# EAGLE board afb_r001 (EAGLE 9.6.2)
REV: B
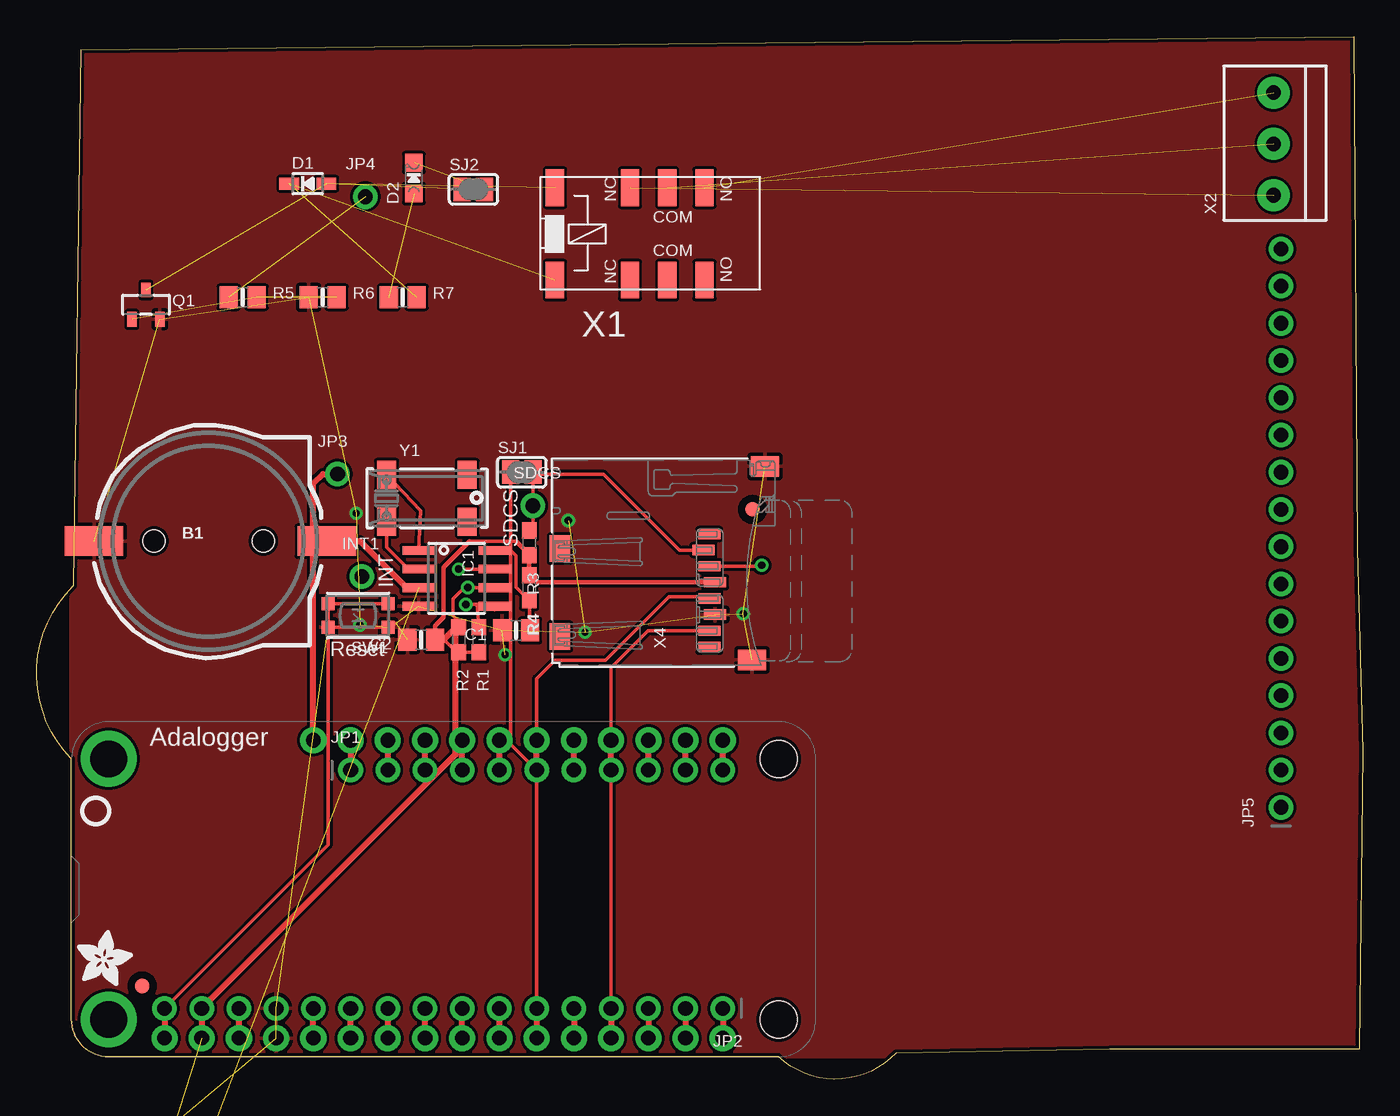
[diagram p0: board, top side]
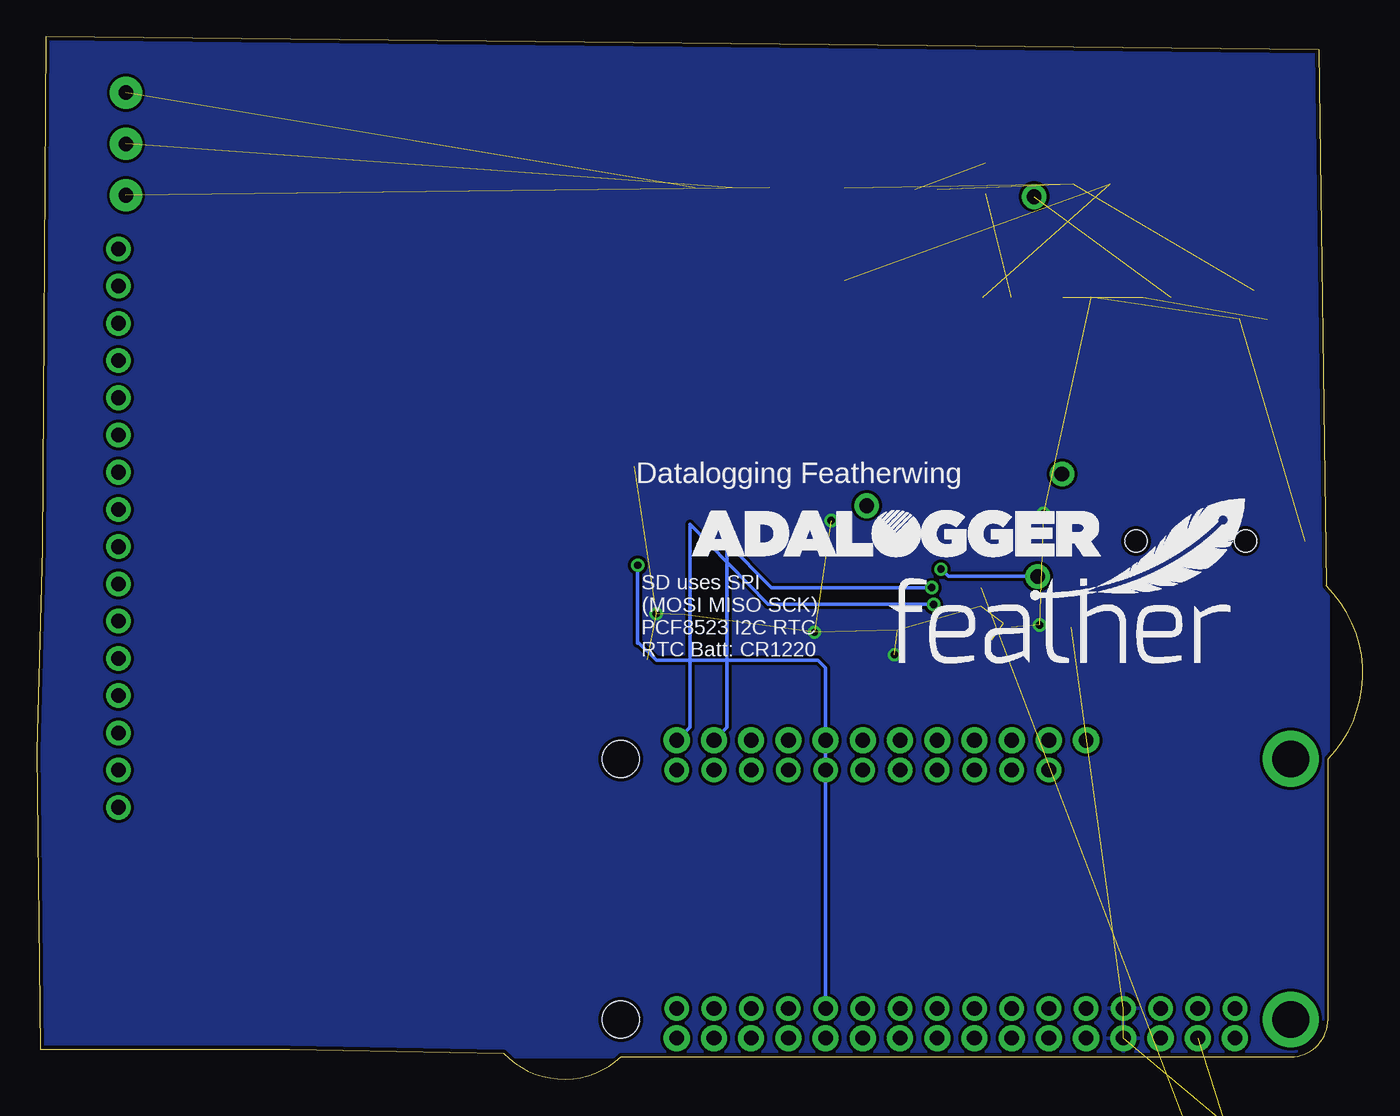
[diagram p1: board, bottom side, seen from below]

Size 90.52 x 71.13 mm. Coordinates in mm from the lower left corner, seen from the top.
Outline: 3.01,70.24 89.88,71.13 90.13,36.2 90.52,22.36 90.26,2.04 73.24,2.04 58.64,1.79 arc-90 50.64,1.53 4.92,1.53 arc-90 2.38,4.07 2.38,21.85 arc-90 2.5,33.66 3.01,70.24
Copper layers (1*16): Top 0.035mm / dielectric 1.5mm / Bottom 0.035mm
Design rules "adafruit *": minimum track width 8mil, minimum drill 15.5mil, track to track 8mil, track to pad 8mil, pad to pad 8mil, via to via 8mil, smd to smd 8mil, copper to edge 10mil, drill to drill 8mil, minimum pad ring 10mil, minimum via ring 8mil, stop-mask expansion 2mil, vias tented up to drill 20mil, thermal gap 10mil
Net classes: 1 HV: width 0.406 mm, drill 0.381 mm, clearance 1.016 mm

## Footprints (pad centres in the part's own frame; a part is rotated, then mirrored left to right if it is on the bottom)
CR1220-2 = smd 4 x 2: + 8.29,0; - -7.6,0 | hole 1.5: 3.95,0; -3.5,0
0805-NO = smd 1.24 x 1.5: 1 -0.95,0; 2 0.95,0
C0603 = smd 1.1 x 1: 1 -0.85,0; 2 0.85,0
SOD-323 = smd 1.35 x 0.8: A 1.27,0; C -1.27,0
CHIPLED_0805_NOOUTLINE = smd 1.2 x 1.2: A 0,-1.05; C 0,1.05
SMADIODE = smd 2.54 x 2.54: A 2.349,0; C -2.349,0
FIDUCIAL_1MM = smd 1 x 1: 1 0,0
SOIC8_150MIL = smd 0.6 x 2.2: 1 -1.905,-2.6; 2 -0.635,-2.6; 3 0.635,-2.6; 4 1.905,-2.6; 5 1.905,2.6; 6 0.635,2.6; 7 -0.635,2.6; 8 -1.905,2.6
SO16W = smd 0.6 x 2.2: 1 -4.445,-4.6; 2 -3.175,-4.6; 3 -1.905,-4.6; 4 -0.635,-4.6; 5 0.635,-4.6; 6 1.905,-4.6; 7 3.175,-4.6; 8 4.445,-4.6; 9 4.445,4.6; 10 3.175,4.6; 11 1.905,4.6; 12 0.635,4.6; 13 -0.635,4.6; 14 -1.905,4.6; 15 -3.175,4.6; 16 -4.445,4.6
1X01_ROUND = drill 1 pad 1.676: 1 0,0
1X11_ROUND = drill 1 pad 1.676: 1 -12.7,0; 2 -10.16,0; 3 -7.62,0; 4 -5.08,0; 5 -2.54,0; 6 0,0; 7 2.54,0; 8 5.08,0; 9 7.62,0; 10 10.16,0; 11 12.7,0
1X16_ROUND = drill 1 pad 1.676: 1 -19.05,0; 2 -16.51,0; 3 -13.97,0; 4 -11.43,0; 5 -8.89,0; 6 -6.35,0; 7 -3.81,0; 8 -1.27,0; 9 1.27,0; 10 3.81,0; 11 6.35,0; 12 8.89,0; 13 11.43,0; 14 13.97,0; 15 16.51,0; 16 19.05,0
2X20 = drill 1.016 octagon: 1 -24.13,-1.27; 2 -24.13,1.27; 3 -21.59,-1.27; 4 -21.59,1.27; 5 -19.05,-1.27; 6 -19.05,1.27; 7 -16.51,-1.27; 8 -16.51,1.27; 9 -13.97,-1.27; 10 -13.97,1.27; 11 -11.43,-1.27; 12 -11.43,1.27; 13 -8.89,-1.27; 14 -8.89,1.27; 15 -6.35,-1.27; 16 -6.35,1.27; 17 -3.81,-1.27; 18 -3.81,1.27; 19 -1.27,-1.27; 20 -1.27,1.27; 21 1.27,-1.27; 22 1.27,1.27; 23 3.81,-1.27; 24 3.81,1.27; 25 6.35,-1.27; 26 6.35,1.27; 27 8.89,-1.27; 28 8.89,1.27; 29 11.43,-1.27; 30 11.43,1.27; 31 13.97,-1.27; 32 13.97,1.27; 33 16.51,-1.27; 34 16.51,1.27; 35 19.05,-1.27; 36 19.05,1.27; 37 21.59,-1.27; 38 21.59,1.27; 39 24.13,-1.27; 40 24.13,1.27
L3225M = smd 1.6 x 2.2: 1 -1.4,0; 2 1.4,0
FEATHERWING_NODIM = drill 1 pad 1.778: 1 6.35,1.27; 2 8.89,1.27; 3 11.43,1.27; 4 13.97,1.27; 5 16.51,1.27; 6 19.05,1.27; 7 21.59,1.27; 8 24.13,1.27; 9 26.67,1.27; 10 29.21,1.27; 11 31.75,1.27; 12 34.29,1.27; 13 36.83,1.27; 14 39.37,1.27; 15 41.91,1.27; 16 44.45,1.27; 17 44.45,21.59; 18 41.91,21.59; 19 39.37,21.59; 20 36.83,21.59; 21 34.29,21.59; 22 31.75,21.59; 23 29.21,21.59; 24 26.67,21.59; 25 24.13,21.59; 26 21.59,21.59; 27 19.05,21.59; 28 16.51,21.59 | drill 2.5 pad 3.81: P$1 2.54,20.32; P$2 2.54,2.54 | hole 2.54: 48.26,20.32; 48.26,2.54
SOT23-R = smd 0.635 x 1.016: 1 -0.95,-1; 2 0.95,-1; 3 0,1
0603-NO = smd 1.1 x 1: 1 -0.85,0; 2 0.85,0
0805-THM = drill 0.813 pad 1.676 octagon: 1 -5.08,0; 2 5.08,0
R0603 = smd 1 x 1.1: 1 -0.85,0; 2 0.85,0
SOLDERJUMPER_CLOSEDWIRE = smd 1.168 x 1.6: 1 -0.762,0; 2 0.762,0 | smd 0.635 x 0.203: WIRE 0,0
BTN_KMR2_4.6X2.8 = smd 0.9 x 0.9: A 2.05,0.8; A' -2.05,0.8; B 2.05,-0.8; B' -2.05,-0.8
SOIC8E_MPS = smd 1.46 x 0.559: 1 -2.724,1.905; 2 -2.724,0.635; 3 -2.724,-0.635; 4 -2.724,-1.905; 5 2.724,-1.905; 6 2.724,-0.635; 7 2.724,0.635; 8 2.724,1.905 | smd 2.565 x 3.454: EPAD 0,0
RELAY_EE2_NOLATCH = smd 1.25 x 2.5: 1 -6.5,-3.15; 3 -1.37,-3.15; 4 1.17,-3.15; 5 3.71,-3.15; 8 3.71,3.15; 9 1.17,3.15; 10 -1.37,3.15; 12 -6.5,3.15
TERMBLOCK_1X3-3.5MM = drill 1 pad 2.184: 1 3.55,0; 2 0.05,0; 3 -3.45,0
MICROSD = smd 0.7 x 1.5: 1 9,-10.64; 2 7.9,-10.24; 3 6.8,-10.64; 4 5.7,-11.04; 5 4.6,-10.64; 6 3.5,-11.04; 7 2.4,-10.64; 8 1.3,-10.64 | smd 1.8 x 1.4: CD1 2,-0.44; CD2 8,-0.44 | smd 1.4 x 1.9: MT1 0.4,-13.54; MT2 13.6,-14.44
CRYSTAL_8X3.8 = smd 1.3 x 1.9: P$1 -2.75,-1.6; P$2 2.75,-1.6; P$3 2.75,1.6; P$4 -2.75,1.6

## Placement (x,y rotation side)
B1  cr1220  [CR1220-2]  11.52,36.71 0 top
C1  10uF  [0805-NO]  32.73,30.62 180 top
C2  10uF  [0805-NO]  26.25,29.98 180 top
C3  [C0603]  -4.23,-21.84 0 top  (outside the outline)
C4  [C0603]  -4.23,-42.66 0 top  (outside the outline)
C5  [C0603]  -4.23,-55.49 0 top  (outside the outline)
C6  [C0603]  -4.23,-71.75 0 top  (outside the outline)
C7  [C0603]  -4.23,-75.43 0 top  (outside the outline)
D1  1N4148  [SOD-323]  18.51,61.1 0 top
D2  RED  [CHIPLED_0805_NOOUTLINE]  25.75,61.48 0 top
D3  [SMADIODE]  -1.94,-38.35 0 top  (outside the outline)
FID1  FIDUCIAL_1MM  [FIDUCIAL_1MM]  48.86,38.87 0 top
FID2  FIDUCIAL_1MM  [FIDUCIAL_1MM]  7.2,6.36 0 top
IC1  PCF8523T  [SOIC8_150MIL]  28.67,34.17 270 top
IC2  DS3231/SO  [SO16W]  -11.34,-74.16 0 top  (outside the outline)
INT1  [1X01_ROUND]  22.19,34.3 0 top
JP1  [1X11_ROUND]  34.13,21.09 0 top
JP2  [1X16_ROUND]  27.78,4.83 180 top
JP3  [1X01_ROUND]  20.54,41.28 0 top
JP4  [1X01_ROUND]  22.44,60.21 0 top
JP5  [1X16_ROUND]  84.93,37.6 90 top
JP6  [2X20]  20.16,-27.93 0 top  (outside the outline)
L2  [L3225M]  -3.34,-47.49 0 top  (outside the outline)
MS1  FEATHERWING_NODIM  [FEATHERWING_NODIM]  2.38,1.53 0 top
Q1  MMBT2222  [SOT23-R]  7.46,52.84 0 top
R1  10K  [0603-NO]  30.19,29.98 270 top
R2  10K  [0603-NO]  28.79,29.98 270 top
R3  100K  [0603-NO]  33.62,36.58 270 top
R4  1K  [0603-NO]  33.62,33.54 270 top
R5  1K  [0805-NO]  14.06,53.35 0 top
R6  10K  [0805-NO]  19.52,53.35 0 top
R7  1K  [0805-NO]  24.98,53.35 0 top
R8  [0805-THM]  0.22,-14.22 0 top  (outside the outline)
R9  [R0603]  -4.23,-18.15 0 top  (outside the outline)
R10  [R0603]  -4.23,-51.81 0 top  (outside the outline)
R11  [R0603]  -4.23,-59.3 0 top  (outside the outline)
R12  [R0603]  -4.23,-79.24 0 top  (outside the outline)
SDCS  [1X01_ROUND]  33.87,39.12 0 top
SJ1  [SOLDERJUMPER_CLOSEDWIRE]  33.11,41.41 0 top
SJ2  [SOLDERJUMPER_CLOSEDWIRE]  29.81,60.71 0 top
SW1  KMR2  [BTN_KMR2_4.6X2.8]  21.94,31.63 180 top
U1  MP1584  [SOIC8E_MPS]  -1.69,-8.12 0 top  (outside the outline)
U$2  [FEATHERLOGO]  32.35,28.33 0 bottom
U$3  [ADALOGGER_LOGO]  45.81,35.57 0 bottom
U$4  [ADAFRUIT_3.5MM]  2.76,6.36 0 top
U$5  [PCBFEAT-REV-040]  4.03,18.3 0 top
X1  RELAY_NONLATCHING-EE2NUH  [RELAY_EE2_NOLATCH]  41.87,57.67 0 top
X2  [TERMBLOCK_1X3-3.5MM]  84.42,63.76 90 top
X3  [TERMBLOCK_1X3-3.5MM]  -0.54,-65.4 0 top  (outside the outline)
X4  microsd  [MICROSD]  35.27,28.2 90 top
Y1  32khz  [CRYSTAL_8X3.8]  26.63,39.63 0 top

## Library data of the parts
B1 C1 C2 D1 D2 IC1 INT1 JP1-JP5 MS1 Q1 R1-R7 SDCS SJ1 SJ2 SW1 U$2-U$5 X1-X4 Y1 = microbuilder
C3-C7 D3 JP6 R8-R12 = adafruit
FID1 FID2 = microbuilder; BOM: EXCLUDE
IC2 = DS3231; AVAILABILITY: Unavailable; DESCRIPTION: Real Time Clock (RTC) IC Clock/Calendar I²C, 2-Wire Serial 16-SOIC (0.295, 7.50mm Width); MF: Maxim Integrated; MP: DS3231; PACKAGE: SOIC-16 Maxim Integrated; PRICE: None
L2 = rcl; SPICEPREFIX: L
U1 = MP1584; BUILT_BY: EMA_Cory; COPYRIGHT: Copyright (C) 2018 Accelerated Designs. All rights reserved; DATASHEET: https://www.monolithicpower.com/en/documentview/productdocument/index/version/2/document_type/Datasheet/lang/en/sku/MP1584/document_id/204; MANUFACTURER_PART_NUMBER: MP1584; SOURCELIBRARY: MPS_2020-01-27; VENDOR: Monolithic Power Systems Inc

## Nets
3.3V: D1.C R7.2 X1.1
4V: C4.1 C7.1 D3.C L2.1 L2.2 R8.2 U1.1
+3V3: C2.1 IC2.2 JP2.15 MS1.2 R1.2 R2.2 R3.2 R4.1 X4.4
A: JP2.12 MS1.5
AREF: JP2.14 MS1.3
B: JP2.11 MS1.6
BSC: C7.2
C: JP2.10 MS1.7
CMC: C3.1 C5.1 U1.3
COM1 [HV]: X1.9 X2.2
CR1220: B1.+ IC1.3 IC2.14
CS: JP1.6 MS1.22 SJ1.1
D: JP2.9 MS1.8
E: JP2.8 MS1.9
EN: JP1.1 MS1.27
ENC: R12.2 U1.2
F: JP2.7 MS1.10
G: JP2.1 MS1.16
GND: B1.- C1.2 C2.2 C4.2 C5.2 D3.A IC1.4 IC2.13 JP2.13 MS1.4 Q1.2 R6.1 R9.1 R10.1 R11.1 SW1.A SW1.A' U1.5 U1.EPAD X3.1 X4.6 X4.MT1 X4.MT2
H: JP1.9 MS1.19
I: JP1.8 MS1.20
INT1: IC1.7 INT1.1
J: JP1.7 MS1.21
L: JP1.5 MS1.23
M: JP1.4 MS1.24
MISO: JP2.4 MS1.13 X4.7
MOSI: JP2.5 MS1.12 X4.3
N: JP1.3 MS1.25
N$1: C1.1 IC1.8 R4.2
N$2: D1.A Q1.3 SJ2.1 X1.12
N$3: R8.1 R9.2 U1.4
N$4: C3.2 R10.2
N$5: IC2.16
N$6: C6.1 R12.1 U1.7 X3.2 X3.3
N$7: IC1.1 Y1.P$4
N$8: IC1.2 Y1.P$1
N$9: IC2.15
N$10: R11.2 U1.6
N$11: U1.8
N$22: Q1.1 R5.2 R6.2
N$24: JP4.1 R5.1
N$25: D2.C SJ2.2
N$26: D2.A R7.1
N$28 [HV]: X1.10 X2.3
NO1 [HV]: X1.8 X2.1
RESET: JP2.16 MS1.1 SW1.B SW1.B'
RX: JP2.3 MS1.14
SCK: JP2.6 MS1.11 X4.5
SCL: IC1.6 JP1.10 MS1.18 R2.1
SD_CS: R3.1 SDCS.1 SJ1.2 X4.2
SDA: IC1.5 JP1.11 MS1.17 R1.1
TX: JP2.2 MS1.15
USB: JP1.2 MS1.26
VBAT: JP3.1 MS1.28

## Tracks (layer width: path | path; a pad name or v marks a point on that pad's centre or on a via)
3.3V  (2 unrouted)
4V  (6 unrouted)
+3V3  (1 unrouted)
  Top 0.254: R1.2 R2.2 28.32,29.47 27.82,29.98 C2.1 | 29.56,36.71 32.73,36.71 | 33.24,36.2 33.28,36.2
  Top 0.305: 29.56,36.71 27.78,34.93 27.78,31.5 27.2,30.93 C2.1 | 32.73,36.71 33.24,36.2 | 33.28,36.2 R3.2 R4.1 34.1,33.9 X4.4
  Top 0.406: MS1.2 JP2.15 28.6,22.17 28.6,30.8 27.78,29.98 C2.1
A
  Top 0.406: MS1.5 JP2.12
AREF
  Top 0.406: MS1.3 JP2.14
B
  Top 0.406: MS1.6 JP2.11
C
  Top 0.406: JP2.10 MS1.7
CMC  (2 unrouted)
COM1  (1 unrouted)
CR1220  (1 unrouted)
  Top 0.406: B1.+ 22.06,36.71 25.24,33.54 IC1.3
CS
  Top 0.254: SJ1.1 32.35,22.87 JP1.6
  Top 0.406: JP1.6 MS1.22
D
  Top 0.406: MS1.8 JP2.9
E
  Top 0.406: MS1.9 JP2.8
EN
  Top 0.406: MS1.27 JP1.1
ENC  (1 unrouted)
F
  Top 0.406: MS1.10 JP2.7
G
  Top 0.406: JP2.1 MS1.16
GND  (via drill 0.5)  (27 unrouted)
  Top 0.254: SW1.A SW1.A' 24.53,31.12
  other vias: 21.81,38.62 48.22,31.76 36.29,38.11 22.06,31 37.43,30.49 31.97,28.96
  pour Top: 2.38,71.64 2.38,1.53 90.39,1.53 90.39,71.64
  pour Bottom: 2.38,71.51 2.38,1.53 90.52,1.53 90.52,71.51
H
  Top 0.406: JP1.9 MS1.19
I
  Top 0.406: JP1.8 MS1.20
INT1  (via drill 0.48)
  Top 0.254: IC1.7 v28.79,34.81
  Bottom 0.254: v28.79,34.81 28.29,34.3 INT1.1
J
  Top 0.406: JP1.7 MS1.21
L
  Top 0.406: JP1.5 MS1.23
M
  Top 0.406: JP1.4 MS1.24
MISO
  Top 0.254: X4.7 41.73,30.6 39.21,28.08 JP2.4
  Top 0.406: JP2.4 MS1.13
MOSI  (via drill 0.5)
  Top 0.254: v49.49,35.06 49.44,35 X4.3
  Top 0.406: JP2.5 MS1.12
  Bottom 0.254: 49.49,29.73 49.49,29.85 | 49.49,29.85 v49.49,35.06 | JP2.5 36.67,28.08 37.18,28.58 48.22,28.58 49.49,29.85
N
  Top 0.406: JP1.3 MS1.25
N$1
  Top 0.254: C1.1 R4.2 32.73,33.58 32.73,35.7 32.35,36.08 IC1.8
N$2  (3 unrouted)
N$3  (2 unrouted)
N$4  (1 unrouted)
N$6  (4 unrouted)
N$7
  Top 0.254: Y1.P$4 26.19,38.8 IC1.1
N$8
  Top 0.254: Y1.P$1 23.88,36.29 25.24,34.93 IC1.2
N$10  (1 unrouted)
N$22  (2 unrouted)
N$24  (1 unrouted)
N$25  (1 unrouted)
N$26  (1 unrouted)
N$28  (1 unrouted)
NO1  (1 unrouted)
RESET
  Top 0.254: SW1.B' SW1.B 19.89,15.99 JP2.16
  Top 0.406: JP2.16 MS1.1
RX
  Top 0.406: JP2.3 MS1.14
SCK
  Top 0.254: JP2.6 34.13,27.31 35.4,28.58 38.83,28.58 43.14,32.9 45.81,32.9 X4.5
  Top 0.406: JP2.6 MS1.11
SCL  (via drill 0.5)
  Top 0.254: IC1.6 v29.43,33.54 29.17,33.54 28.41,32.77 28.41,31.63 28.67,31.38 R2.1
  Top 0.406: JP1.10 MS1.18
  Bottom 0.254: MS1.18 43.4,24.01 43.4,36.58 40.35,33.54 v29.43,33.54
SD_CS
  Top 0.254: X4.2 43.88,36.1 38.7,41.28 34,41.28 SJ1.2 SDCS.1 33.87,37.69 R3.1
SDA  (via drill 0.5)
  Top 0.254: 30.06,32.39 31.27,32.39 IC1.5 31.27,32.03 | 30.06,32.39 v29.3,32.39 | R1.1 30.06,32.39
  Top 0.406: JP1.11 MS1.17
  Bottom 0.254: v29.3,32.39 40.6,32.39 45.94,37.85 45.94,24.01 MS1.17
TX
  Top 0.406: JP2.2 MS1.15
USB
  Top 0.406: MS1.26 JP1.2
VBAT
  Top 0.406: MS1.28 18.89,40.65 19.52,41.28 JP3.1

## Text on the board
tPlace: SDCS | INT | Reset | Adalogger
bPlace: Datalogging Featherwing | SD uses SPI / (MOSI MISO SCK) / PCF8523 I2C RTC / RTC Batt: CR1220